# Altium PCB PCB_DAC.PcbDoc
Units mil, origin at the board's own origin, x right, y up, seen from the top; angles counter-clockwise.
Board outline 2555 x 3295 mil, 2 copper layers (Top Layer, Bottom Layer); 43 components, 51 nets, 220 pads, 37 vias.
Unrouted connection lines stored in the file: 11.
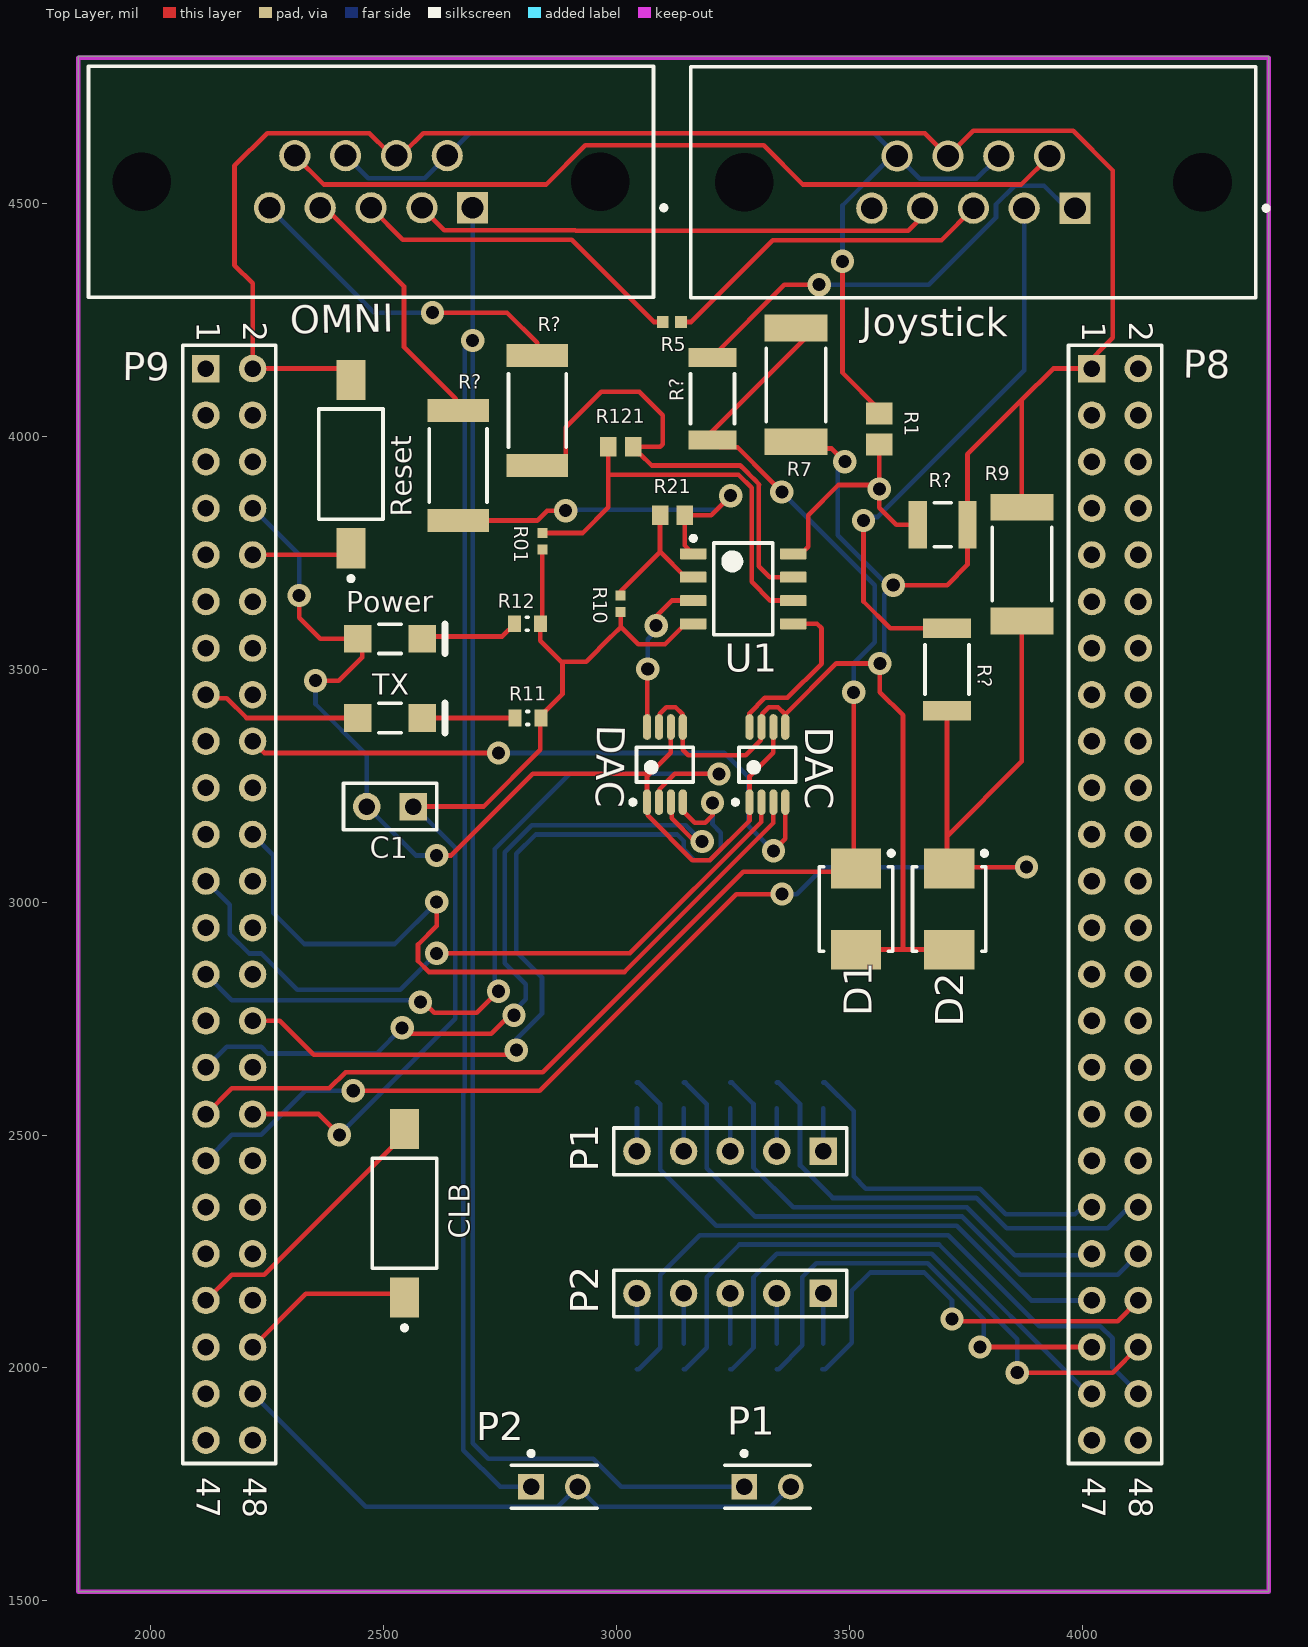
[diagram p0: Top Layer view]
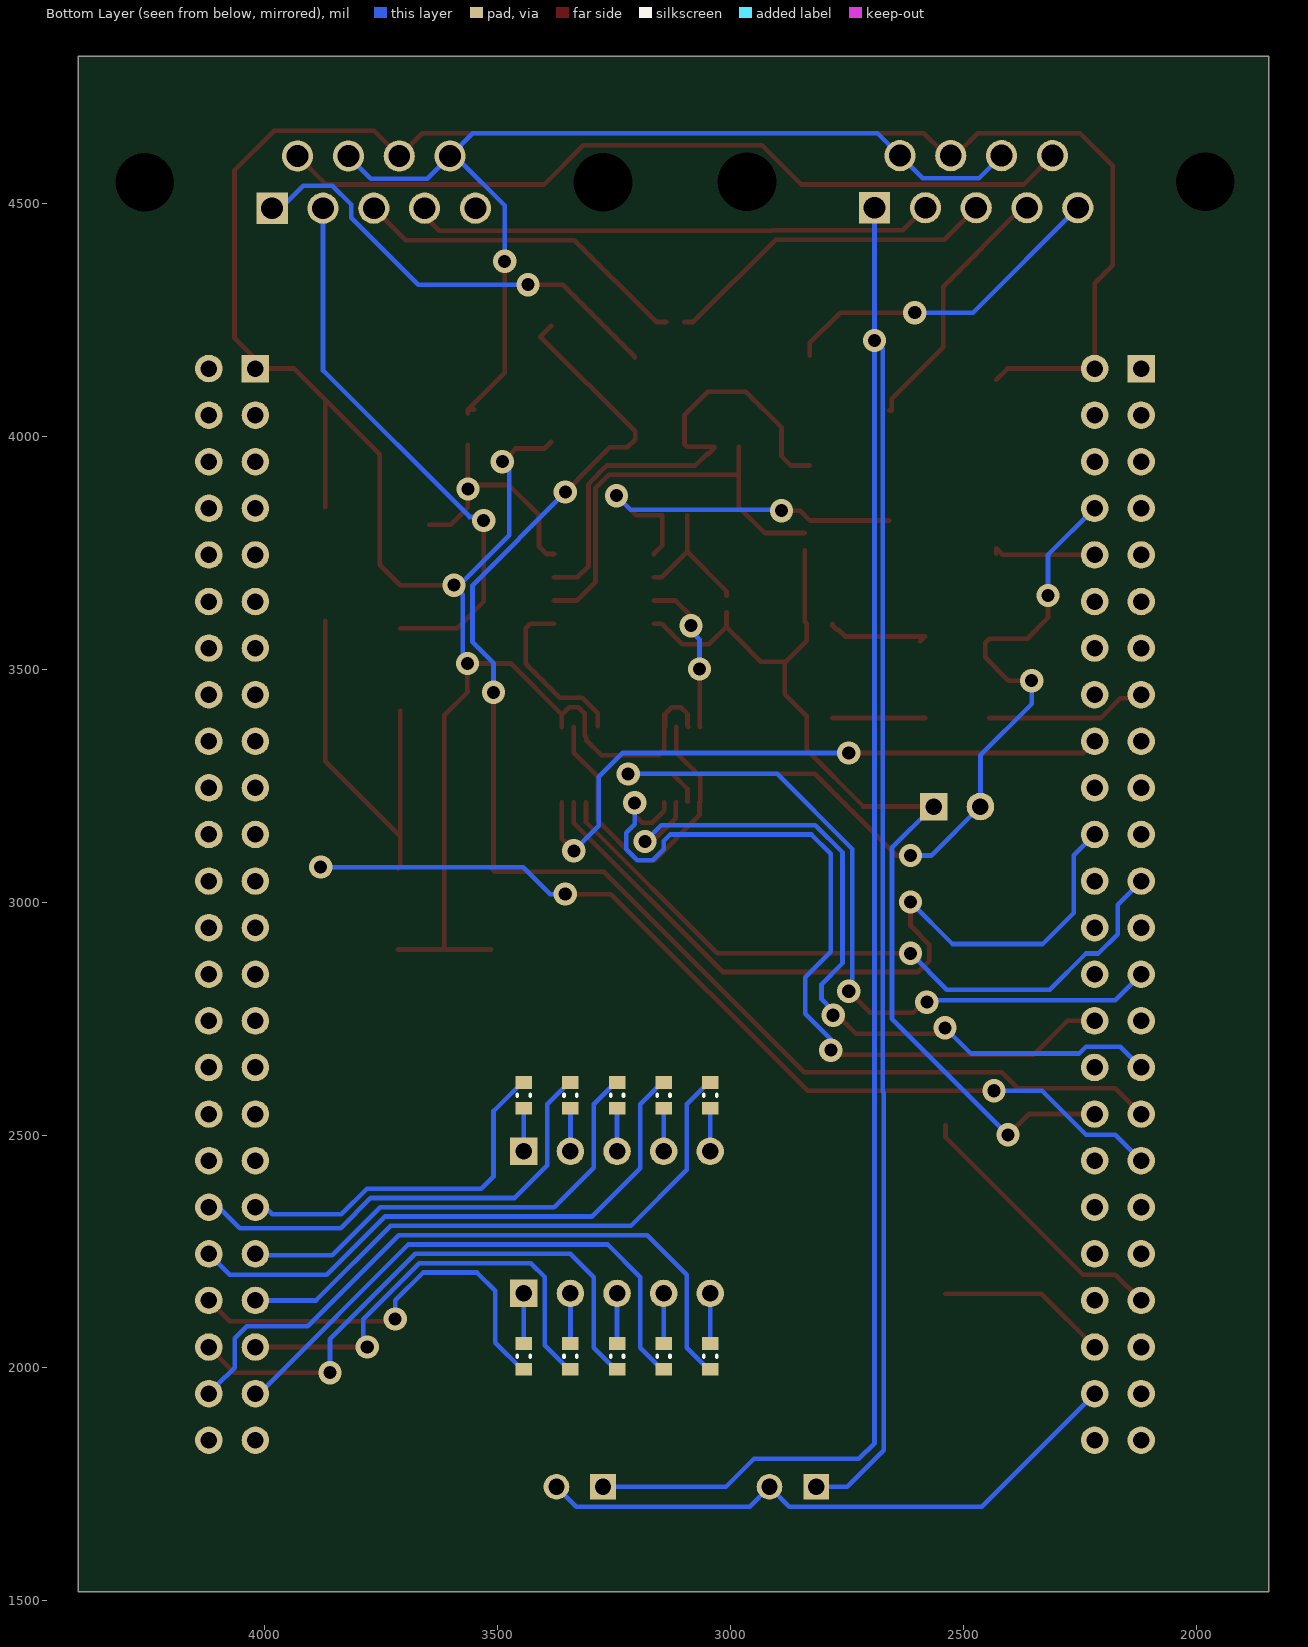
[diagram p1: Bottom Layer view, seen from below]

## Layer stack, top to bottom
Top Solder: solder mask 0.4, Solder Resist, Dk 3.5
Top Layer: signal copper 1.4
Dielectric 1: dielectric 12.6, FR-4, Dk 4.8
Bottom Layer: signal copper 1.4
Bottom Solder: solder mask 0.4, Solder Resist, Dk 3.5

## Board outline
1845,1520 4400,1520 4400,4815 1845,4815

## Design rules (kind name [scope] priority, off if disabled: settings)
Clearance [All] p1: gap=10 ignorepadtopadclearanceinfootprint=FALSE except(0: Arc-Hole Track-Hole SMDPad-Hole THPad-Hole Via-Hole Fill-Hole Poly-Hole Region-Hole Text-Hole)
PolygonConnect [All] p1: connectstyle=Relief reliefconductorwidth=10 reliefentries=4 polygonreliefangle="90 Angle" airgapwidth=10
RoomDefinition BBB_PCB [InComponentClass('BBB_PCB')] p1: confinementstyle=ConfineIn formatcopy=TRUE lockcomponents=FALSE outline 1845,1520 4400,1520 4400,4812.09 1845,4812.09
RoutingVias [All] p1: holewidth=28 width=50 viastyle="Through Hole" minholewidth=28 minwidth=50 maxholewidth=28 maxwidth=50
SolderMaskExpansion [All] p1: expansion=4
Width [All] p1: maxlimit=10 minlimit=10 preferedwidth=10
30 further rules are at their usual default settings.

## Classes and differential pairs
component class BBB_PCB: CLB D1 D2 DAC P1 P2 P8 P9 Power R1 R01 R5 R7 R9 R10 R11 R12 R21 R121 R? Reset TX

## Components (designator, comment, footprint, x,y, rotation, side; value= is the part's Value field where it differs from the comment)
C1 "Comment" HDR1X2 2563.94,3205 r180 top
CLB "Calibration" TECO-FSMSMTR_V 2545,2332.09 r90 top
D1 "1SMB5920BT3G" ONSC-SMB-2-403A-03_H_V 3513.94,2985 r270 top
D2 "1SMB5920BT3G" ONSC-SMB-2-403A-03_H_V 3713.94,2985 r270 top
DAC "MCP4921-E/MS" MSOP-MS8_L 3103.94,3295 r90 top
DAC "MCP4921-E/MS" MSOP-MS8_L 3323.94,3295 r90 top
Joystick "171-009-113R911" NORCO-171-009-113R911_V 3765.87,4545 r180 top
OMNI "171-009-113R911" NORCO-171-009-113R911_V 2473.11,4545.91 r180 top
P1 "Header 5" HDR1X5 3443.94,2465 r180 top
P1 "5-146280-2" TECO-5-146280-2_V 3323.94,1745 r0 top
P2 "Header 5" HDR1X5 3443.94,2160 r180 top
P2 "5-146280-2" TECO-5-146280-2_V 2866.65,1745 r0 top
P8 "Header 24X2" HDR2X24 4020,4145 r270 top
P9 "Header 24X2" HDR2X24 2118.94,4145 r270 top
Power "HSMG-C150" AVAG-HSMX-C150_V 2513.94,3565 r0 top
R01 "560" RESC1005X40X25NL05T05 2840.75,3774.37 r90 top
R1 "150" RESC2013X60X40NL20T25 3563.94,4015 r270 top
R5 "470" RESC1005X40X25ML05T05 3118.94,4245 r0 top
R7 "560" RESC2512(6432)_M 3385,4110 r270 top value="560.00 Ohm"
R9 "560" RESC2512(6432)_M 3870,3725.31 r270 top value="560.00 Ohm"
R10 "560" RESC1005X40X25NL05T05 3008.94,3640 r90 top
R11 "330R 1% 0603(1608)" RESC0603(1608)_L 2810,3395 r180 top value="330.00 Ohm"
R12 "330R" RESC0603(1608)_L 2808.94,3597.09 r180 top value="330.00 Ohm"
R21 "2.7k" RESC1609X50X30ML10T20 3120,3830 r0 top
R121 "2.7k" RESC1609X50X30ML10T20 3008.94,3977.09 r0 top
R? "1K8 5% 2512(6432)" RESC2512(6432)_N 2830,4055 r90 top value="1800.00 Ohm" (schematic designator R3)
R? "1K8 5% 2512(6432)" RESC2512(6432)_N 2660,3936.89 r90 top value="1800.00 Ohm" (schematic designator R4)
R? "1K 5% 2010(5025)" RESC2010(5025)_L 3709.41,3499.26 r270 top value="1000.00 Ohm" (schematic designator R8)
R? "1K 5% 2010(5025)" RESC2010(5025)_L 3205.95,4080 r270 top value="1000.00 Ohm" (schematic designator R6)
R? "820" RESC3225X60X45LL20T20 3700,3810 r0 top (schematic designator R2)
Reset "FSMSMTR" TECO-FSMSMTR_V 2430,3940 r90 top
TX "HSMG-C150" AVAG-HSMX-C150_V 2513.94,3395 r0 top
U1 "LM358AM" D0008A_N 3272.01,3672.09 r0 top
? "330R" RESC0603(1608)_L 3043.94,2025 r90 bottom value="330.00 Ohm"
? "330R" RESC0603(1608)_L 3043.94,2585 r270 bottom value="330.00 Ohm"
? "330" RESC0603(1608)_L 3243.94,2585 r270 bottom value="330.00 Ohm"
? "330" RESC0603(1608)_L 3343.94,2585 r270 bottom value="330.00 Ohm"
? "330R" RESC0603(1608)_L 3143.94,2585 r270 bottom value="330.00 Ohm"
? "330" RESC0603(1608)_L 3443.94,2585 r270 bottom value="330.00 Ohm"
? "330" RESC0603(1608)_L 3443.94,2025 r90 bottom value="330.00 Ohm"
? "330" RESC0603(1608)_L 3343.94,2025 r90 bottom value="330.00 Ohm"
? "330R." RESC0603(1608)_L 3143.94,2025 r90 bottom value="330.00 Ohm"
? "330." RESC0603(1608)_L 3243.94,2025 r90 bottom value="330.00 Ohm"

## Footprints (in the part's own frame and the unit in brackets; to place one, negate y for a bottom-side part, rotate by r counter-clockwise, add the part's x,y. Pads: shape width x height; smd on the part's side, far side on the other; paste and mask are expansions set on the pad)
AVAG-HSMX-C150_V [mm] "SMD, 2-Leads, Body 3.2x1.6mm"
  rect 1.5x1.5 smd: 1(-1.75,0) 2(1.75,0)
  silkscreen extent -0.6,-0.8 3,0.8, body extent -1.6,-0.8 1.6,0.8, height 1.1
D0008A_N [mm] "SOIC, 8-Leads, Body 5x4mm, Pitch 1.27mm, IPC Medium Density"
  rrect17% 1.45x0.6 smd: 1(-2.725,1.905) 2(-2.725,0.635) 3(-2.725,-0.635) 4(-2.725,-1.905) 5(2.725,-1.905) 6(2.725,-0.635) 7(2.725,0.635) 8(2.725,1.905)
  silkscreen extent -2.85,-2.5 1.6,2.88, body extent -3,-2.45 3,2.45, height 1.63
HDR1X2 [mm] "Connector; Header; 2 Position"
  rect 1.5x1.5 hole 0.9: 1(0,0)
  round 1.5 hole 0.9: 2(2.54,0)
  silkscreen extent -1.27,-1.27 3.81,1.27
HDR1X5 [mm] "Connector; Header; 5 Position"
  rect 1.5x1.5 hole 0.9: 1(0,0)
  round 1.5 hole 0.9: 2(2.54,0) 3(5.08,0) 4(7.62,0) 5(10.16,0)
  silkscreen extent -1.27,-1.27 11.43,1.27
HDR2X24 [mm] "Connector; Header; 24x2 Position"
  rect 1.5x1.5 hole 0.9: 1(0,0)
  round 1.5 hole 0.9: 2(0,2.54) 3(2.54,0) 4(2.54,2.54) 5(5.08,0) 6(5.08,2.54) 7(7.62,0) 8(7.62,2.54) 9(10.16,0) 10(10.16,2.54) 11(12.7,0) 12(12.7,2.54) 13(15.24,0) 14(15.24,2.54) 15(17.78,0) 16(17.78,2.54) 17(20.32,0) 18(20.32,2.54) 19(22.86,0) 20(22.86,2.54) 21(25.4,0) 22(25.4,2.54) 23(27.94,0) 24(27.94,2.54) 25(30.48,0) 26(30.48,2.54) 27(33.02,0) 28(33.02,2.54) 29(35.56,0) 30(35.56,2.54) 31(38.1,0) 32(38.1,2.54) 33(40.64,0) 34(40.64,2.54) 35(43.18,0) 36(43.18,2.54) 37(45.72,0) 38(45.72,2.54) 39(48.26,0) 40(48.26,2.54) 41(50.8,0) 42(50.8,2.54) 43(53.34,0) 44(53.34,2.54) 45(55.88,0) 46(55.88,2.54) 47(58.42,0) 48(58.42,2.54)
  silkscreen extent -1.27,-1.27 59.69,3.81
MSOP-MS8_L [mm] "TSOP, 8-Leads, Body 3x3mm, Pitch 0.65mm, IPC High Density"
  oval 1.4x0.45 smd: 1(-2.05,0.975) 2(-2.05,0.325) 3(-2.05,-0.325) 4(-2.05,-0.975) 5(2.05,-0.975) 6(2.05,-0.325) 7(2.05,0.325) 8(2.05,0.975)
  silkscreen extent -2.17,-1.55 0.95,1.87, body extent -1.55,-1.55 1.55,1.55, height 1.1
NORCO-171-009-113R911_V [mm] "THD, 9-Leads, Body 30.8x12.6mm, Pitch 2.77mm"
  rect 1.7x1.7 hole 1.194: 1(-5.54,1.42)
  round 1.7 hole 1.194: 2(-2.77,1.42) 3(0,1.42) 4(2.77,1.42) 5(5.54,1.42) 6(-4.155,-1.42) 7(-1.385,-1.42) 8(1.385,-1.42) 9(4.155,-1.42)
  round 2.9 hole 3.2 unplated: MH1(-12.495,0) MH2(12.495,0)
  silkscreen extent -16.09,-6.3 15.4,6.3, body extent -15.4,-6.3 15.41,6.3, height 13.24
ONSC-SMB-2-403A-03_H_V [mil] "Molded, 2-Leads, Body 4.6x3.95mm"
  rect 85x107.99 smd: 1(-87.01,0) 2(87.01,0)
  silkscreen extent -125,-79 91,81, body extent -91,-78 91,78, height 95
RESC0603(1608)_L [mm] "Chip Resistor, Body 1.6x0.8mm, IPC High Density"
  rect 0.7x0.9 smd: 1(-0.7,0) 2(0.7,0)
  silkscreen extent -0.05,-0.35 0.05,0.35, body extent -0.85,-0.47 0.85,0.47, height 0.6
RESC1005X40X25ML05T05 [mm] "Chip Resistor, 2-Leads, Body 1.00x0.50mm, IPC Low Density"
  rect 0.65x0.65 smd: 1(-0.5,0) 2(0.5,0)
  body extent -0.53,-0.27 0.53,0.28, height 0.4
RESC1005X40X25NL05T05 [mm] "Chip Resistor, 2-Leads, Body 1.00x0.50mm, IPC Medium Density"
  rect 0.55x0.55 smd: 1(-0.45,0) 2(0.45,0)
  body extent -0.53,-0.27 0.53,0.28, height 0.4
RESC1609X50X30ML10T20 [mm] "Chip Resistor, 2-Leads, Body 1.55x0.85mm, IPC Low Density"
  rect 0.9x1.05 smd: 1(-0.675,0) 2(0.675,0)
  body extent -0.82,-0.48 0.82,0.48, height 0.5
RESC2010(5025)_L [mm] "Chip Resistor, Body 5.0x2.5mm, IPC High Density"
  rect 1.05x2.6 smd: 1(-2.25,0) 2(2.25,0)
  silkscreen extent -1.35,-1.2 1.35,1.2, body extent -2.6,-1.35 2.6,1.35, height 0.71
RESC2013X60X40NL20T25 [mm] "Chip Resistor, 2-Leads, Body 2.00x1.25mm, IPC Medium Density"
  rect 1.2x1.45 smd: 1(-0.85,0) 2(0.85,0)
  body extent -1.1,-0.72 1.1,0.72, height 0.6
RESC2512(6432)_M [mm] "Chip Resistor, Body 6.4x3.2mm, IPC Low Density"
  rect 1.45x3.45 smd: 1(-3.1,0) 2(3.1,0)
  silkscreen extent -2,-1.63 2,1.63, body extent -3.25,-1.7 3.25,1.7, height 0.75
RESC2512(6432)_N [mm] "Chip Resistor, Body 6.4x3.2mm, IPC Medium Density"
  rect 1.25x3.35 smd: 1(-3,0) 2(3,0)
  silkscreen extent -2,-1.57 2,1.58, body extent -3.25,-1.7 3.25,1.7, height 0.75
RESC3225X60X45LL20T20 [mm] "Chip Resistor, 2-Leads, Body 3.20x2.50mm, IPC High Density"
  rect 1x2.6 smd: 1(-1.35,0) 2(1.35,0)
  silkscreen extent -0.45,-1.2 0.45,1.2, body extent -1.7,-1.35 1.7,1.35, height 0.6
TECO-5-146280-2_V [mm] "Connector, 2-Leads, Body 4.67x2.34mm, Pitch 2.54mm"
  rect 1.4x1.4 hole 0.89: 1(-1.27,0)
  round 1.4 hole 0.89: 2(1.27,0)
  silkscreen extent -2.33,-1.17 2.33,1.94, body extent -2.34,-1.17 2.34,1.17, height 5.33
TECO-FSMSMTR_V [mm] "SMD, 2-Leads, Body 6x3.5mm, Pitch 9.19mm"
  rect 2.2x1.6 smd: 1(-4.595,0)
  rect 2.18x1.6 smd: 2(4.595,0)
  silkscreen extent -6.37,-1.75 3,1.75, body extent -4.98,-1.75 4.98,1.75, height 4.4

## Part data
C1: library part CMP-2008-03080-1, Manufacturer=Kemet, Part Number=C0402C104J4RACTU
CLB: library part CMP-2000-07501-1, "FSMSM Push Button Switch, 50 mA, -35 to 85 degC, 2-Pin SMD, RoHS, Tape and Reel", Case\/Package=SMD/SMT, Contact Current Rating=50mA, Contact Resistance=100mOhm, Manufacturer="TE Connectivity", Max Operating Temperature=85degC, Max Voltage Rating (DC)=12V, Min Operating Temperature=-35degC, Operating Force=180gf, Package Description="2-Pin Surface Mount Device, Body 6 x 3.5 mm, Pitch 9.19 mm", Package Quantity=1800, Package Reference=FSMSMTR, Voltage Rating (DC)=24V, Actuator Length=1.07mm, Actuator Material=Polyamide, Contact Material=Brass, Contact Plating=Silver, Current Rating=50mA, Datasheet URL=http://www.te.com/commerce/DocumentDelivery/DDEController?Action=showdoc&DocId=Customer+Drawing%7F1437566-3%7FC2%7Fpdf%7FEnglish%7FENG_CD_1437566-3_C2_1437566_3_1_c.dwg.pdf%7F1437566-4, Datasheet Version="Rev. C2, 08/2014", Electrical Life=20000Cycles, ELV=Compliant, Illumination Type=Illuminated, Lead Free=LeadFree, Manufacturer URL=http://www.te.com/, Mechanical Life=20000Cycles, Mount=SurfaceMount, Mounting Technology=SurfaceMount, Orientation=Straight, Packaging=TapeandReel, REACH SVHC=Unknown, RoHSCompliant=true, Switch Travel=0.25mm, Termination=GullWing, Throw Configuration=SPST
D1 D2: library part CMP-1060-00222-1, "3 W Zener Voltage Regulator, 2-Pin SMB, Pb-Free, Tape and Reel", Manufacturer="On Semiconductor", ComponentLink1Description="Manufacturer URL", ComponentLink1URL=http://www.onsemi.com/, ComponentLink2Description=Datasheet, ComponentLink2URL=http://www.onsemi.com/pub_link/Collateral/1SMB5913BT3-D.PDF, ComponentLink3Description="Package Specification", ComponentLink3URL=http://www.onsemi.com/pub_link/Collateral/1SMB5913BT3-D.PDF, DatasheetVersion="Rev. 8", Mounting Technology="Surface Mount", PackageDescription="2-Pin Small Molded Package, J-Bend Lead, Body 4.33 x 3.625 mm", PackageReference=SMB-2-403A-03_H, PackageVersion="Rev. H, 05/2011", Packing="Tape and Reel", PartNumber=1SMB5920BT3G, RoHS=Pb-Free, VZ Typ (V)=6.2
DAC DAC: library part CMP-0188-00937-2, "12-Bit DAC with SPI Interface, 8-Pin MSOP, Extended Temperature", ComponentLink1Description="Manufacturer URL", ComponentLink1URL=http://www.microchip.com/, ComponentLink2Description=Datasheet, ComponentLink2URL=http://ww1.microchip.com/downloads/en/DeviceDoc/22248a.pdf, ComponentLink3Description="Package Specification", ComponentLink3URL=http://www.microchip.com/stellent/groups/techpub_sg/documents/packagingspec/en012702.pdf, DatasheetVersion="revA, Apr-2010", PackageDescription="8-Lead Plastic Micro Small Outline Package (MS) [MSOP]", PackageReference=MSOP-MS8, PackageVersion="revBB, Aug-2009", RevisionNote="URLs added. DatasheetVersion updated. Sch updated."
Joystick OMNI: library part CMP-2000-05495-1, "Male Header, Pitch 2.77 mm, 2 Row, 9 Position, Height 12.52 mm, Tail Length 4.8 mm, -55 to 100 degC, RoHS, Tray", Color=Black, Current Rating=5A, Manufacturer=Norcomp, Operating Temperature=-50°C~100°C, Package Description="Male Header, Pitch 2.77 mm, 2 Row, 9 Position, Height 12.52 mm, Tail Length 4.8 mm", Standard Package=80, Voltage Rating=-, 3D Model=171-009-113Rzzz.pdf171-009-113Rzzz.stp171-009-113Rzzz.igs, Associated Product=160-09MA-ND-DUSTCOVERFORDB9MALE, Catalog Drawings=Footprint9,15,25-,37Position171,172SeriesDipSolder, Category=Connectors,Interconnects, Connector Style=D-Sub, Connector Type=Plug,MalePins, Contact Finish=Gold, Contact Finish Thickness=Flash, Contact Type=Signal, Datasheet URL=http://www.norcomp.net/rohspdfs/Connectors/17Y/171/171-YYY-113RYY1.pdf, Datasheet Version="Rev. 11, 09/2015", Family=D-SubConnectors, Features=BoardLock,GroundingIndents, Flange Feature=MatingSide,FemaleScrewlock(4-40), Housing Material=Polyamide(PA9T),Nylon9T, Ingress Protection=-, Manufacturer URL=http://www.norcomp.net/, Mating Products=4209FE-ND-CONND-SUBRCPT9POSVERTSOLDER709FE-ND-CONNDB9CRIMPFEMALENICKEL709FER-ND-CONNDB9CRIMPFEMALETIN186-009-292L001-ND-CONNDSUBRCPT9POSSTRIDC186-009-292L551-ND-CONNDSUBRCPT9POSSTRIDC209F-ND-CONNDSUBRCPT9POSSTRSLDRCUP709F-ND-CONNDB9CRIMPFEMALETIN1709F-ND-CONNDB9CRIMPFEMYLWCHROME4209F-ND-CONND-SUBRCPT9POSVERTSOLDER1709FA-ND-CONNDB9CRIMPFEMYLWCHROME209FEA-ND-CONNDSUBRCPT9POSSTRSLDRCUP, Mounting Technology=ThroughHole, Mounting Type=ThroughHole, Number of Positions=9, Number of Rows=2, Online Catalog=171Series, Other Names=171009113R9119209ME, Other Related Documents=171-009-113R911MaterialDeclaration, Package Reference=171-009-113R911, Packaging=Tray, Product Training Modules=D-SubConnectors, Series=171, Shell Material, Finish=Steel,NickelPlated, Shell Size, Connector Layout=1(DE,E), Termination=Solder
P1 P2: "Header, 5-Pin", LatestRevisionDate=17-Jul-2002, LatestRevisionNote="Re-released for DXP Platform.", Publisher="Altium Limited"
P1 P2: library part CMP-2000-07492-1, "Male Header, Pitch 2.54 mm, 1 x 2 Position, Height 8.21 mm, Tail Length 3.05 mm, -65 to 105 degC, RoHS, Bulk", Case\/Package=100, Colour=Black, Current Rating=3A, Flammability Rating=UL94V-0, High Temperature Housing=Yes, Manufacturer="TE Connectivity", Max Current Rating=5A, Max Operating Temperature=105degC, Min Operating Temperature=-65degC, Package Description="Male Header, Pitch 2.54 mm, 1 x 2 Position, Height 8.21 mm, Tail Length 3.05 mm", Package Quantity=500, Approvals=CSA, Board Standoff=No(Without), Connector Type=Header, Contact Gender=Male, Contact Material=CopperAlloy, Contact Mating Length=0.23inch, Contact Plating=Matte, Contact Protection=No(Without), Contact Shape=Square, Datasheet URL=http://www.te.com/commerce/DocumentDelivery/DDEController?Action=showdoc&DocId=Customer+Drawing%7F146280%7FH1%7Fpdf%7FEnglish%7FENG_CD_146280_H1.pdf%7F5-146280-2, Datasheet Version="Rev. H1, 08/2016", Depth=2.34mm, Gasket=No(Without), High Speed Serial Data Connector=No, Housing Colour=Black, Housing Material=Polymer, Keyed=No, Length=4.67mm, Manufacturer URL=http://www.te.com/, Mating Alignment=No(Without), Mating Connector Lock=No(Without), Mating Post Length=0.23inch, Mount=ThroughHole, Mounting Technology=ThroughHole, Number of Contacts=2, Number of Positions=2, Number of Rows=1, Orientation=Straight, Package Reference=5-146280-2, Packaging=Carton, Panel Mount Retention=No(Without), PCB Mounting Orientation=Vertical, PCB Mount Retention=Without, PCB Thickness=0.063inch, Pitch=2.54mm, Radiation Hardening=No, RoHSCompliant=true, Row Spacing=2.54mm, Selectively Loaded=No(Without), Stabilizers=No(Without), Termination=ThroughHole, Termination Post Length=0.12inch
P8 P9: "Header, 24-Pin, Dual row", LatestRevisionDate=17-Jul-2002, LatestRevisionNote="Re-released for DXP Platform.", Publisher="Altium Limited"
Power TX: library part CMP-2000-05061-1, "Chip LED, Green, 65 mW, 25 mA, -40 to 85 degC, 2-Pin SMD, RoHS, Tape and Reel", Forward Current If=20mA, Forward Voltage=2.2V, Forward Voltage VF Max=2.6V, LED Colour=Green, Manufacturer=Avago, Operating Temperature Max=85degC, Operating Temperature Min=-30degC, Operating Temperature Range=-30degCto+85degC, Opto Case Style=SMD, Package Description="2-Pin Surface Mount Device, Body 3.2 x 1.6 mm", Package Reference=HSMX-C150, Reverse Protection Voltage=5V, Storage Temperature Min=-40degC, Bulb Size=1.6mmx2mm, Datasheet URL=https://datasheet.ciiva.com/11774/0900766b804a6539-11774272.pdf, Datasheet Version=Mar-12, Dominant Wavelength=572nm, External Depth=1.1mm, External Length / Height=3.2mm, External Width=1.6mm, Forward Current If Max=20mA, LED Mounting=SMD, LED Type=Standard, Lens Shape=Rectangular, Light Output Orientation=TopEmitting, Luminous Intensity=15mcd, Luminous Intensity @ If Min=4.5mcd, Luminous Intensity Typ=15mcd, Manufacturer URL=http://www.avagotech.com/, Material=GaP, Mounting Type=SMD, MSL=MSL2A-4weeks, No. of Pins=2, Opto Mounting Orientation=Top, Packaging=CutTape, Peak Wavelength=570nm, PIV Max=5V, Storage Temperature Max=85degC, SVHC=NoSVHC(16-Jun-2014), Viewing Angle=170deg, Voltage Vf Min=2.2V, Voltage Vf Typ=2.2V, Wavelength Typ=572nm
R01 R10: library part CMP-2002-00097-1, Manufacturer="Vishay Dale", Part Number=CRCW0402560RFKED
R1: library part CMP-2001-00596-1, Manufacturer=Panasonic, Part Number=ERA6AEB151V
R5: library part CMP-2002-01153-1, Manufacturer=Panasonic, Part Number=ERJ2RKF4700X
R7 R9: library part CMP-1018-00068-1, "560R 1W 5% 2512 (6432 Metric)  SMD", Case-EIA=2512, Case-Metric=6432, Power="1 W", Tolerance="5 %", Technology=SMT
R11 R12 ? ? ? ? ? ? ? ? ? ?: library part CMP-1012-00454-1, "330R 0.1W 1% 0603 (1608 Metric)  SMD", Case-EIA=0603, Case-Metric=1608, Power="0.1 W", Tolerance="1 %", Technology=SMT
R21 R121: library part CMP-2000-03182-1, Manufacturer="Vishay Dale", Part Number=CRCW06032K70FKEA
R? R?: library part CMP-1018-00080-1, "1K8 1W 5% 2512 (6432 Metric)  SMD", Case-EIA=2512, Case-Metric=6432, Power="1 W", Tolerance="5 %", Technology=SMT
R? R?: library part CMP-1017-00074-1, "1K 0.75W 5% 2010 (5025 Metric)  SMD", Case-EIA=2010, Case-Metric=5025, Power="0.75 W", Tolerance="5 %", Technology=SMT
R?: library part CMP-2005-00227-1, Manufacturer="Vishay Dale", Part Number=CRCW1210820RJNEAHP
Reset: library part CMP-2000-07501-1, "FSMSM Push Button Switch, 50 mA, -35 to 85 degC, 2-Pin SMD, RoHS, Tape and Reel", Case\/Package=SMD/SMT, Contact Current Rating=50mA, Contact Resistance=100mOhm, Manufacturer="TE Connectivity", Max Operating Temperature=85degC, Max Voltage Rating (DC)=12V, Min Operating Temperature=-35degC, Operating Force=180gf, Package Description="2-Pin Surface Mount Device, Body 6 x 3.5 mm, Pitch 9.19 mm", Package Quantity=1800, Voltage Rating (DC)=24V, Actuator Length=1.07mm, Actuator Material=Polyamide, Contact Material=Brass, Contact Plating=Silver, Current Rating=50mA, Datasheet URL=http://www.te.com/commerce/DocumentDelivery/DDEController?Action=showdoc&DocId=Customer+Drawing%7F1437566-3%7FC2%7Fpdf%7FEnglish%7FENG_CD_1437566-3_C2_1437566_3_1_c.dwg.pdf%7F1437566-4, Datasheet Version="Rev. C2, 08/2014", Electrical Life=20000Cycles, ELV=Compliant, Illumination Type=Illuminated, Lead Free=LeadFree, Manufacturer URL=http://www.te.com/, Mechanical Life=20000Cycles, Mount=SurfaceMount, Mounting Technology=SurfaceMount, Orientation=Straight, Package Reference=FSMSMTR, Packaging=TapeandReel, REACH SVHC=Unknown, RoHSCompliant=true, Switch Travel=0.25mm, Termination=GullWing, Throw Configuration=SPST
U1: library part CMP-0055-00796-3, "Low Power Dual Operational Amplifier, 8-pin Narrow SOIC", Manufacturer="Texas Instruments", Package Reference=D0008A, PackageTopMarking=NSZXTT*LM*358AM, PowerWise=N, Code_IPC=SOIC127P600-8, Code_JEDEC=MS-012-AA, ComponentLink1Description="Datasheet URL", ComponentLink1URL=http://www.ti.com/general/docs/lit/getliterature.tsp?genericPartNumber=LM358-N&fileType=pdf, CompType=Amplifiers, PackageDescription="SOIC Narrow, 4.9 x 3.9 x 1.45mm, 8 Lead, 1.27mm Pitch", PinCount=8, RoHS=N

## Via types
v1: diameter 50, hole 28, Top Layer to Bottom Layer, 37 vias

## Nets (pads, with @x,y where several pads share a name; then routed paths per layer and width w, separated by ;. In a path a pad name is that pad's centre, name@x,y a point inside that pad or via, vN(x,y) a via of type N, cw(c..) or ccw(c..) an arc to the next point about the centre after c; other vN are vias at no path point)
GND: C1.1 CLB.1 D1.2 D2.2 DAC.5 DAC.7 Joystick.5 Joystick.8 OMNI.7 P1.2@3373.94,1745 P2.2@2916.65,1745 P8.1 P8.2 P9.1 P9.2 P9.34 P9.43 P9.44 P9.45 P9.46 R01.1 R7.2 R9.1 R10.1 R11.1 R12.1 R?.2@3753.15,3810 Reset.2 U1.4 | length 10259.8
  Top Layer w10: P9.44 2333.03,2159.09 CLB.1@2538.94,2159.09 ; P9.34 2360.47,2545 v1(2405,2500.47) ; Reset.2 2405.91,4145 P9.2 2218.94,4327.97 2180,4366.91 2180,4580 2250.28,4650.28 2469.72,4650.28 2510.24,4609.76 2519.69,4609.76 OMNI.7 2535.59,4609.76 2544.76,4609.76 2585.28,4650.28 3661.97,4650.28 Joystick.8 3765.43,4655 3980,4655 4065,4570 4065,4211.06 3998.94,4145 3937.09,4145 3870,4077.91 ; C1.1 2715,3205 2836.5,3326.5 2836.5,3398.94 2883.94,3446.38 2883.94,3513.62 2881.5,3516.06 ; R01.1@2840.75,3755.12 2840.75,3601.34 R12.1 2836.5,3561.06 2881.5,3516.06 ; 2988.94,3570 2935,3516.06 2881.5,3516.06 ; 2991.02,3572.09 3008.94,3590 ; R10.1 3008.94,3591.06 3046.85,3553.15 3104.05,3553.15 3147.99,3597.09 U1.4 ; DAC.7@3091.14,3375.71 3092.62,3377.19 3092.62,3404.04 3106.85,3418.27 3126.61,3418.27 3140.85,3404.04 3140.85,3375.71 3142.32,3374.23 3142.32,3326.61 3153.94,3315 3277.28,3315 3309.67,3347.38 3309.67,3353.44 3312.87,3356.65 3312.87,3404.29 3326.85,3418.27 3346.61,3418.27 3360.85,3404.04 ; DAC.5@3142.32,3380 3142.32,3403.39 ; DAC.5@3362.32,3375.71 3362.32,3402.56 3471.85,3512.09 v1(3565,3512.09) 3565,3450.8 3564.85,3450.65 3615,3400.51 3615,2897.99 ; R7.2 3399.67,3973.28 3461.72,3973.28 v1(3490,3945) ; D1.2 3615,2897.99 ; v1(3593.94,3680) 3709.41,3680 3753.15,3723.74 3753.15,3810 3753.15,3961.06 3870,4077.91 ; D2.2 3615,2897.99 ; R9.1 3870,4077.91
  Bottom Layer w10: P9.46 2461.5,1702.44 2874.09,1702.44 2916.65,1745 2959.21,1702.44 3331.38,1702.44 P1.2@3373.94,1745 ; v1(2405,2500.47) 2653.94,2749.41 2653.94,3116.57 2565.51,3205 C1.1 ; v1@3473.94,3958.36 3475,3957.29 3475,3787.37 3574.71,3687.65 3586.28,3687.65 v1(3593.94,3680) 3574.71,3660.78 3574.71,3532.63 3565,3522.91 v1(3565,3512.09)
Net_1: ?.1@3043.94,1997.44 P8.46 | length 1478.5
  Bottom Layer w10: ?.1@3043.94,1997.44 3047.87,1997.44 3093.94,2043.5 3093.94,2200 3178.94,2285 3712.09,2285 3907.56,2089.53 4038.44,2089.53 4064.53,2063.44 4064.53,2000.47 4102.5,1962.5 P8.46 ; P8.46@4105,1965 P8.46@4118.94,1965
Net_1: ?.1@3143.94,1997.44 P8.45 | length 1202.1
  Bottom Layer w10: ?.1@3143.94,1997.44 3147.87,1997.44 3193.94,2043.5 3193.94,2195 3263.94,2265 3692.09,2265 3996.06,1961.02 4014.96,1961.02 P8.45@4018.94,1965
Net_1: ?.1@3243.94,1997.44 P8.44 | length 1237.7
  Top Layer w10: v1(3860,1990) 4065,1990 P8.44
  Bottom Layer w10: ?.1@3243.94,1997.44 3247.87,1997.44 3293.94,2043.5 3293.94,2195 3343.94,2245 3676.57,2245 3860,2061.57 v1(3860,1990)
Net_1: ?.1@3343.94,1997.44 P8.43 | length 977.7
  Top Layer w10: v1(3780,2045) P8.43
  Bottom Layer w10: ?.1@3343.94,1997.44 3347.87,1997.44 3398.94,2048.5 3398.94,2195.27 3428.67,2225 3668.28,2225 3788.28,2105 3788.28,2066.72 3780,2058.43 v1(3780,2045)
Net_1: ?.1@3443.94,1997.44 P8.42 | length 914.6
  Top Layer w10: v1(3720,2105) 3724.53,2100.47 4075.47,2100.47 P8.42
  Bottom Layer w10: ?.1@3441.53,1997.44 3443.94,1997.44 3447.87,1997.44 3505,2054.57 3505,2165.47 3544.53,2205 3660,2205 3720,2145 v1(3720,2105)
Net_1: ?.1@3043.94,2612.56 P8.41 | length 1259.8
  Bottom Layer w10: ?.1@3043.94,2612.56 3047.87,2612.56 3093.94,2566.5 3093.94,2425 3213.94,2305 3730,2305 3890,2145 3998.94,2145 P8.41@4018.94,2165
Net_1: ?.1@3143.94,2612.56 P8.40 | length 1245.8
  Bottom Layer w10: ?.1@3143.94,2612.56 3147.87,2612.56 3193.94,2566.5 3193.94,2428.94 3297.87,2325 3742.09,2325 3866.61,2200.47 4075.47,2200.47 P8.40
Net_1: ?.1@3243.94,2612.56 P8.39 | length 1017.9
  Bottom Layer w10: ?.1@3243.94,2612.56 3247.87,2612.56 3293.94,2566.5 3293.94,2430 3378.94,2345 3752.09,2345 3855,2242.09 3996.02,2242.09 P8.39@4018.94,2265
Net_1: ?.1@3343.94,2612.56 P8.38 | length 988.1
  Bottom Layer w10: ?.1@3343.94,2612.56 3347.87,2612.56 3393.94,2566.5 3393.94,2434.73 3463.67,2365 3772.22,2365 3837.22,2300 4053.94,2300 P8.38@4104.47,2350.53
Net_1: ?.1@3443.94,2612.56 P8.37 | length 768.3
  Bottom Layer w10: ?.1@3443.94,2612.56 3447.87,2612.56 3508.94,2551.5 3508.94,2411.06 3535,2385 3780.51,2385 3835.51,2330 3983.94,2330 P8.37@4004.47,2350.53
Net_2: ?.2@3143.94,2052.56 P2.4 | length 107.4
  Bottom Layer w10: ?.2@3143.94,2052.56 P2.4
Net_2: ?.2@3043.94,2557.44 P1.5 | length 92.4
  Bottom Layer w10: P1.5 ?.2@3043.94,2557.44
Net_2: ?.2@3243.94,2557.44 P1.3 | length 92.4
  Bottom Layer w10: P1.3 ?.2@3243.94,2557.44
Net_2: ?.2@3343.94,2557.44 P1.2@3343.94,2465 | length 92.4
  Bottom Layer w10: P1.2@3343.94,2465 ?.2@3343.94,2557.44
Net_2: ?.2@3443.94,2557.44 P1.1@3443.94,2465 | length 92.4
  Bottom Layer w10: P1.1@3443.94,2465 ?.2@3443.94,2557.44
Net_2: ?.2@3043.94,2052.56 P2.5 | length 107.4
  Bottom Layer w10: ?.2@3043.94,2052.56 P2.5
Net_2: ?.2@3143.94,2557.44 P1.4 | length 92.4
  Bottom Layer w10: P1.4 ?.2@3143.94,2557.44
Net_2: ?.2@3243.94,2052.56 P2.3 | length 107.4
  Bottom Layer w10: ?.2@3243.94,2052.56 P2.3
Net_2: ?.2@3343.94,2052.56 P2.2@3343.94,2160 | length 107.4
  Bottom Layer w10: ?.2@3343.94,2052.56 P2.2@3343.94,2160
Net_2: ?.2@3443.94,2052.56 P2.1@3443.94,2160 | length 107.4
  Bottom Layer w10: ?.2@3443.94,2052.56 P2.1@3443.94,2160
NetC1_1: C1.2 DAC.1 DAC.6 P9.7 P9.8 Power.1 | length 2361.8
  Top Layer w10: P9.7 P9.7@2126.44,3837.5 ; v1(2318.94,3657.72) 2318.94,3610 2363.94,3565 Power.1 2453.94,3556.1 2453.94,3525 2403.94,3475 v1(2353.94,3475) ; v1(2613.94,3100) 2645,3100 2820,3275 3065.55,3275 3065.55,3269.41 ; DAC.6@3116.73,3375.71 3116.73,3320.59 3065.55,3269.41 ; DAC.6@3336.73,3375.71 3336.73,3320.59 3285.55,3269.41 3285.55,3214.29 3285.55,3175.05 3200.51,3090 3162.99,3090 3067.03,3185.96 3067.03,3212.81 3065.55,3214.29 3065.55,3269.41
  Bottom Layer w10: P9.8 2318.94,3745 v1(2318.94,3657.72) ; v1(2353.94,3475) 2353.94,3425 2463.94,3315 C1.2 2568.94,3100 v1(2613.94,3100)
NetCLB_2: CLB.2 P9.41 | length 590.6
  Top Layer w10: P9.41 2174.41,2200.47 2243.9,2200.47 2538.94,2495.51 CLB.2@2538.94,2520.91
NetD1_1: D1.1 P9.33 R7.1 R?.2@3205.95,3991.42 | length 3074.2
  Top Layer w10: P9.33 2174.41,2600.47 2383.9,2600.47 2418.43,2635 2842.01,2635 3272.01,3065 3506.93,3065 D1.1@3508.94,3067.01 ; v1(3354.88,3880) 3327.58,3907.3 3328.13,3907.3 3259.68,3975.75 3221.62,3975.75 3205.95,3991.42 3205,3992.37 3205,4010 3408.5,4213.5 R7.1@3385,4237.05 ; v1(3508.94,3450) D1.1@3508.94,3067.01 ; D1.1 D1.1@3508.94,3067.01
  Bottom Layer w10: P9.33 P9.33@2126.44,2552.5 ; v1(3354.88,3880) 3354.88,3879.2 3553.94,3680.15 3553.94,3557.59 3508.94,3512.59 v1(3508.94,3450)
NetD2_1: D2.1 P9.35 R9.2 R?.2@3709.41,3410.68 | length 3058.5
  Top Layer w10: v1(2435,2595) 2835,2595 3257.09,3017.09 v1(3355,3017.09) ; R?.2@3709.41,3410.68 3709.41,3141.14 ; R9.2 3870,3301.73 3709.41,3141.14 ; v1(3880,3075) 3716.93,3075 D2.1 3709.41,3076.54 3709.41,3141.14
  Bottom Layer w10: P9.35 2174.41,2500.47 2237.38,2500.47 2331.91,2595 v1(2435,2595) ; v1(3355,3017.09) 3387.09,3017.09 3445,3075 v1(3880,3075)
NetDAC_2: DAC.2@3091.14,3214.29 P9.27 | length 1705.2
  Top Layer w10: v1(2578.94,2785) 2585.83,2785 2608.75,2762.09 2700.15,2762.09 v1(2746.57,2808.51) ; DAC.2@3092.62,3215.77 3092.62,3242.62 3125,3275 v1(3220,3275)
  Bottom Layer w10: P9.27 2174.41,2789.53 2574.41,2789.53 v1(2578.94,2785) ; v1(2746.57,2808.51) 2746.57,2817.49 2738.94,2825.13 2738.94,3113.87 2900.06,3275 v1(3220,3275)
NetDAC_2: DAC.2@3311.14,3214.29 P9.23 | length 1516.7
  Top Layer w10: v1(2613.94,2890) 3028.79,2890 3310.52,3171.73 3310.52,3213.67 DAC.2@3311.14,3214.29
  Bottom Layer w10: P9.23 2169.64,2994.29 2169.64,2931.32 2211.44,2889.53 2237.38,2889.53 2314.82,2812.09 2536.02,2812.09 v1(2613.94,2890)
NetDAC_3: DAC.3@3116.73,3214.29 P9.31 | length 1692.9
  Top Layer w10: v1(2540,2730) 2552.91,2717.09 2731.02,2717.09 2771.02,2757.09 v1(2780,2757.09) ; DAC.3@3116.73,3214.29 3118.21,3212.81 3118.21,3179.78 3167.99,3130 v1(3183.94,3130)
  Bottom Layer w10: P9.31 2163.46,2689.53 2237.38,2689.53 2251.91,2675 2485,2675 v1(2540,2730) ; v1(2780,2757.09) 2780,2766.06 2805,2791.06 2805,2823.94 2760,2868.94 2760,3106.65 2818.35,3165 3148.94,3165 v1(3183.94,3130)
NetDAC_3: DAC.3@3336.73,3214.29 P9.22 | length 1694.9
  Top Layer w10: v1(2613.94,3000) 2613.94,2948.74 2573.94,2908.74 2573.94,2873.43 2597.37,2850 3017.07,2850 3336.73,3169.66 DAC.3@3336.73,3214.29
  Bottom Layer w10: P9.22 2263.46,3100.47 2263.46,2976.54 2330,2910 2523.94,2910 v1(2613.94,3000)
NetDAC_4: DAC.4@3142.32,3214.29 P9.30 | length 1799.5
  Top Layer w10: P9.30 2277.09,2745 2350,2672.09 2775,2672.09 v1(2785,2682.09) ; DAC.4@3142.32,3214.29 3142.32,3195.59 3167.91,3170 3190,3170 3205.95,3185.95 v1(3205.95,3212.81)
  Bottom Layer w10: v1(2785,2682.09) 2785,2705.52 2840,2760.52 2840,2838.28 2785,2893.28 2785,3103.37 2826.63,3145 3130,3145 3143.94,3131.06 3143.94,3113.43 3167.37,3090 3200.51,3090 3223.94,3113.43 3223.94,3148.72 3205.95,3166.71 v1(3205.95,3212.81)
NetDAC_4: DAC.4@3362.32,3214.29 P9.18 | length 1391.4
  Top Layer w10: P9.18 2243.94,3320 v1(2746.57,3320) ; v1(3336.73,3110) 3362.32,3135.59 DAC.4@3362.32,3214.29
  Bottom Layer w10: v1(2746.57,3320) 3231.57,3320 3282.82,3268.74 3282.82,3163.91 v1(3336.73,3110)
NetDAC_8: DAC.8 U1.3 | length 706.6
  Top Layer w10: DAC.8@3065.55,3375.71 3066.29,3376.45 3066.29,3499.26 v1(3067.03,3500) ; v1(3085,3593.15) 3085,3613.61 3118.48,3647.09 U1.3 ; DAC.8@3285.55,3377.19 3285.55,3405.25 3318.57,3438.27 3366.79,3438.27 3440,3511.47 3440,3587.29 3430.2,3597.09 3379.29,3597.09
  Bottom Layer w10: v1(3067.03,3500) 3067.03,3564.35 3085,3582.33 v1(3085,3593.15)
NetDAC_8: 
NetJoystick_1: Joystick.1 R?.1@3205.95,4168.58 | length 968.6
  Top Layer w10: R?.1@3205.95,4168.58 3205.95,4170.67 3360.28,4325 v1(3435,4325)
  Bottom Layer w10: v1(3435,4325) 3670.31,4325 3814.33,4469.02 3814.33,4497.04 3854.85,4537.56 3917.44,4537.56 3965.91,4489.09 Joystick.1
NetJoystick_2: Joystick.2 R?.1@3709.41,3587.84 | length 1203.4
  Top Layer w10: v1(3530,3818.78) 3530,3645 3587.16,3587.84 R?.1@3709.41,3587.84
  Bottom Layer w10: v1(3530,3818.78) 3537.65,3826.43 3560.4,3826.43 3874.92,4140.95 Joystick.2
NetJoystick_3: Joystick.3 R5.2 | length 728.4
  Top Layer w10: R5.2 3160,4245 3335.63,4420.63 3697.4,4420.63 Joystick.3
NetJoystick_4: Joystick.4 OMNI.2 | length 1125.3
  Top Layer w10: OMNI.2 2630.63,4441.54 2911.75,4441.54 2912.65,4440.63 3625.63,4440.63 3656.81,4471.81 Joystick.4
NetJoystick_6: Joystick.6 OMNI.9 | length 1740.3
  Top Layer w10: OMNI.9 2371.34,4540 2848.83,4540 2932.73,4623.91 3316.09,4623.91 3400,4540 3868.54,4540 Joystick.6
NetJoystick_7: Joystick.7 Joystick.9 OMNI.6 OMNI.8 R1.1 | length 2245.9
  Top Layer w10: v1(3485,4375) 3485,4135.87 R1.1@3563.94,4056.93 ; R1.1@3550.55,4056.93 R1.1@3563.94,4056.93 ; R1.1 R1.1@3563.94,4056.93
  Bottom Layer w10: OMNI.8 2467.05,4553.35 2588.23,4553.35 OMNI.6 2684.88,4650 3553.19,4650 Joystick.9 ; v1(3485,4375) 3485,4494.88 3580.12,4590 Joystick.9@3613.19,4590 ; Joystick.7 3812.45,4608.85 3812.45,4592.44 3772.44,4552.44 3650.75,4552.44 3615.69,4587.5 Joystick.9@3613.19,4590 ; Joystick.9 Joystick.9@3613.19,4590 ; Joystick.9 3629.09,4600.91 3618.19,4590 Joystick.9@3613.19,4590
NetOMNI_1: OMNI.1 P1.1@3273.94,1745 P2.1@2816.65,1745 | length 5840.4
  Bottom Layer w10: OMNI.1 v1(2691.22,4205) ; P2.1@2816.65,1745 2750,1745 2671.22,1823.78 2671.22,2590.12 2673.94,2592.84 2673.94,4187.72 v1(2691.22,4205) ; P1.1@3273.94,1745 3010,1745 2950,1805 2725,1805 2691.22,1838.78 v1(2691.22,4205)
NetOMNI_3: OMNI.3 R5.1 | length 727.6
  Top Layer w10: OMNI.3 2541.57,4421.54 2903.46,4421.54 3080,4245 R5.1
NetOMNI_4: OMNI.4 R?.2@2660,4055 | length 567.2
  Top Layer w10: OMNI.4 2375,4490 2544.06,4320.94 2544.06,4190.94 2654.61,4080.39 2654.61,4055 R?.2@2660,4055
NetOMNI_5: OMNI.5 R?.2@2830,4173.11 | length 722
  Top Layer w10: v1(2605,4265) 2765,4265 2830,4200 R?.2@2830,4173.11
  Bottom Layer w10: OMNI.5 2480,4265 v1(2605,4265)
NetP9_10: P9.10 Reset.1 | length 228.6
  Top Layer w10: P9.10 2415.91,3745 Reset.1 Reset.1@2430,3747.4
NetP9_15: P9.15 TX.1 | length 346.8
  Top Layer w10: P9.15 2126.44,3437.5 2163.46,3437.5 2205.97,3395 TX.1
NetPower_2: Power.2 R12.2 | length 226.2
  Top Layer w10: Power.2@2592.83,3560 2582.83,3570 2754.29,3570 2768.66,3584.37 2772.6,3584.37 2781.38,3593.15 R12.2
NetR1_2: R1.2 R?.1@3646.85,3810 U1.8 | length 521
  Top Layer w10: U1.8 3396.02,3747.09 3411.22,3762.28 3411.22,3830 3476.22,3895 v1@3563.94,3895 ; R1.2 v1@3563.94,3895 ; v1@3566.22,3892.72 v1@3563.94,3892.72 ; R?.1@3646.85,3810 3600.35,3810 3563.94,3846.42 v1(3563.94,3886.54) v1@3563.94,3892.72 ; v1@3563.94,3892.72 v1@3563.94,3895
NetR10_2: R10.2 R21.1 U1.2 | length 301.2
  Top Layer w10: R10.2 3008.94,3667.17 3093.43,3751.65 ; R21.1 3093.43,3751.65 ; U1.2 3147.99,3697.09 3093.43,3751.65
NetR11_2: R11.2 TX.2 | length 198.5
  Top Layer w10: TX.2 R11.2@2781.38,3395
NetR21_2: R21.2 R?.1@2660,3818.78 U1.1 | length 826.4
  Top Layer w10: R?.1@2660,3818.78 2701.34,3818.78 2829.72,3818.78 2850.94,3840 v1(2890.94,3840) v1@2886.8,3835.86 ; U1.1 3146.57,3765.24 R21.2 3202.91,3830 v1(3245,3872.09)
  Bottom Layer w10: v1@2890,3842.09 3215,3842.09 v1(3245,3872.09) v1@3250,3877.09
NetR?_1: R?.1@2830,3936.89
pads on no net: Joystick.MH1 Joystick.MH2 OMNI.MH1 OMNI.MH2 P8.3 P8.4 P8.5 P8.6 P8.7 P8.8 P8.9 P8.10 P8.11 P8.12 P8.13 P8.14 P8.15 P8.16 P8.17 P8.18 P8.19 P8.20 P8.21 P8.22 P8.23 P8.24 P8.25 P8.26 P8.27 P8.28 P8.29 P8.30 P8.31 P8.32 P8.33 P8.34 P8.35 P8.36 P8.47 P8.48 P9.3 P9.4 P9.5 P9.6 P9.9 P9.11 P9.12 P9.13 P9.14 P9.16 P9.17 P9.19 P9.20 P9.21 P9.24 P9.25 P9.26 P9.28 P9.29 P9.32 P9.36 P9.37 P9.38 P9.39 P9.40 P9.42 P9.47 P9.48 R01.2 R121.1 R121.2 U1.5 U1.6 U1.7
copper on no net: | length 2006.6
  Top Layer w10: 2830,3936.89 2871.34,3936.89 2890.94,3956.5 2890.94,4018.66 2967.28,4095 3049.25,4095 3099.25,4045 3099.25,3982.94 3093.39,3977.09 3035.51,3977.09 3035.51,3974.13 3048.23,3961.42 3051.18,3961.42 3075.71,3936.89 3240.95,3936.89 3265.29,3936.89 3274.27,3928.5 3295,3907.77 3305.93,3895.93 3305,3895 3305,3863.43 3305,3853.55 3305,3721.02 3328.94,3697.09 3379.29,3697.09 ; 2840.75,3792.09 2927.09,3792.09 2982.36,3847.36 2982.36,3917.09 ; 2982.36,3977.09 2982.36,3917.09 ; 3379.29,3647.09 3330.28,3647.09 3290,3687.36 3290,3888.94 3261.85,3917.09 2982.36,3917.09

## Polygon pours and split planes (outlines as drawn)
no net on Multi-Layer (solid): 4400,4810

## Keep-outs
Top Layer:
  lines w10: 1845,1520 1845,4812.09 4400,4812.09 4400,1520 1845,1520

## Text inside footprints (layer, text, board x,y; h text height)
P8: Top Overlay "47" at 4000,1765 h50 r270; Top Overlay "48" at 4100,1765 h50 r270; Top Overlay "1" at 4000,4245 h50 r270; Top Overlay "2" at 4100,4245 h50 r270
P9: Top Overlay "47" at 2098.94,1765 h50 r270; Top Overlay "48" at 2198.94,1765 h50 r270; Top Overlay "1" at 2098.94,4245 h50 r270; Top Overlay "2" at 2198.94,4245 h50 r270